# EAGLE board SAMD21_Pro_RF-Panel (EAGLE 9.1.0), part 1 of 7
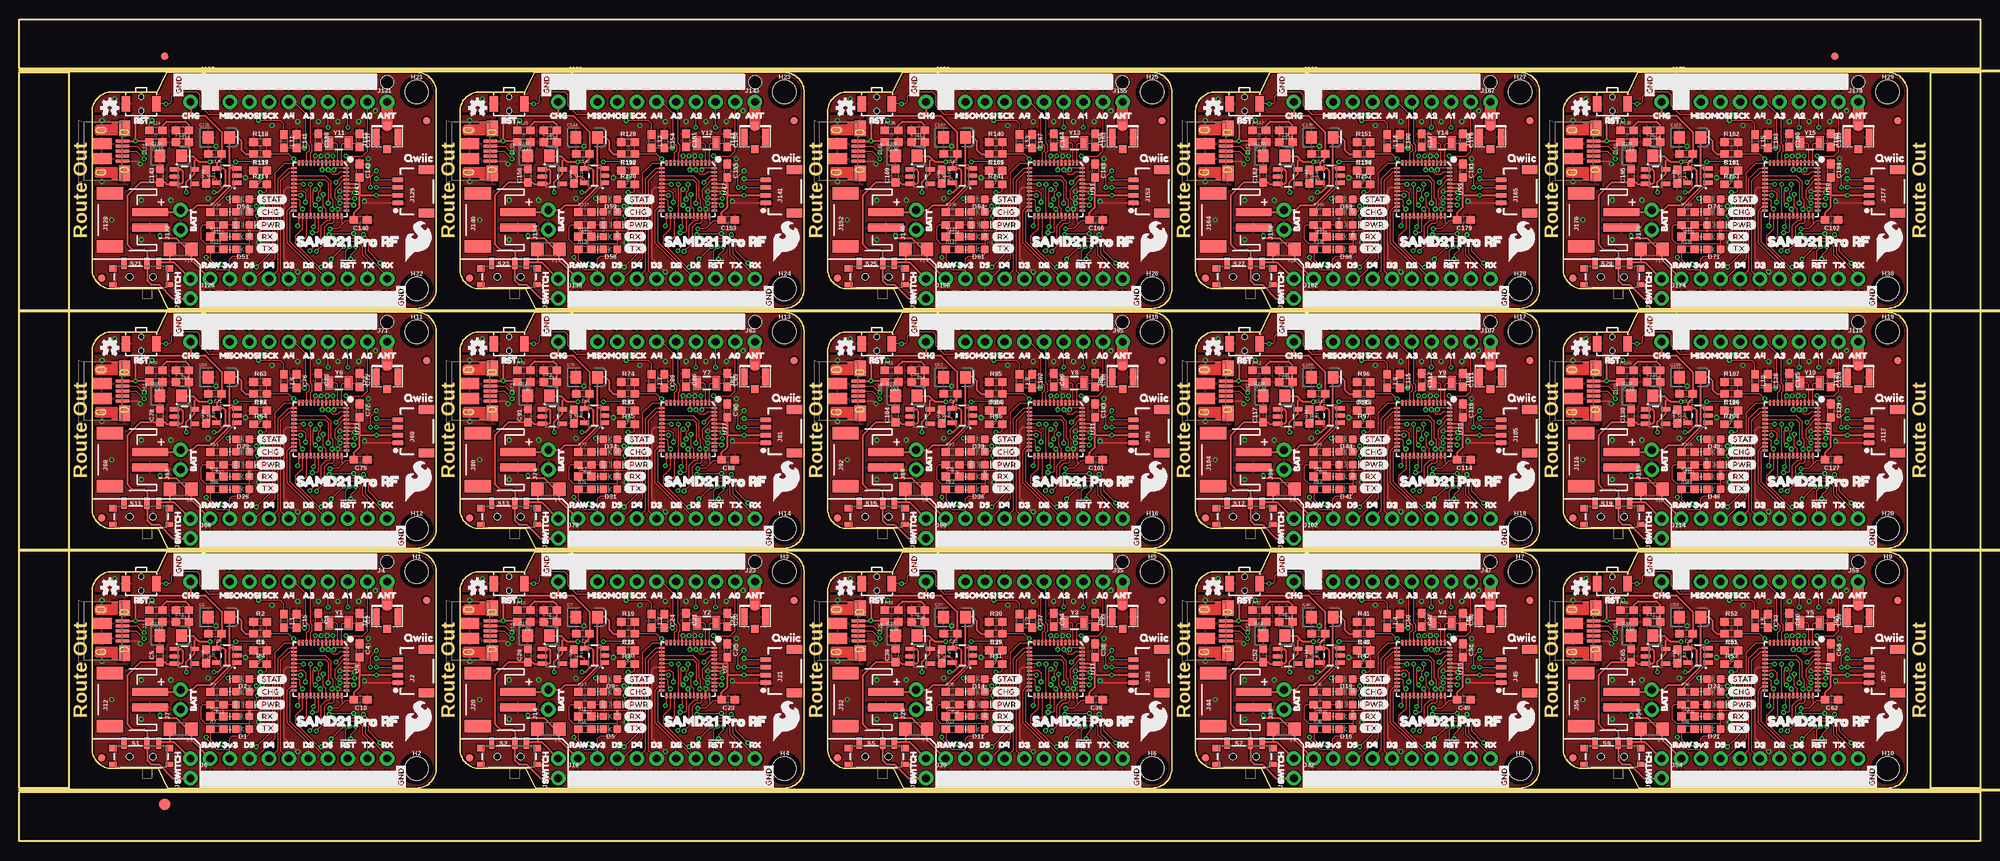
[diagram p0: board, top side]
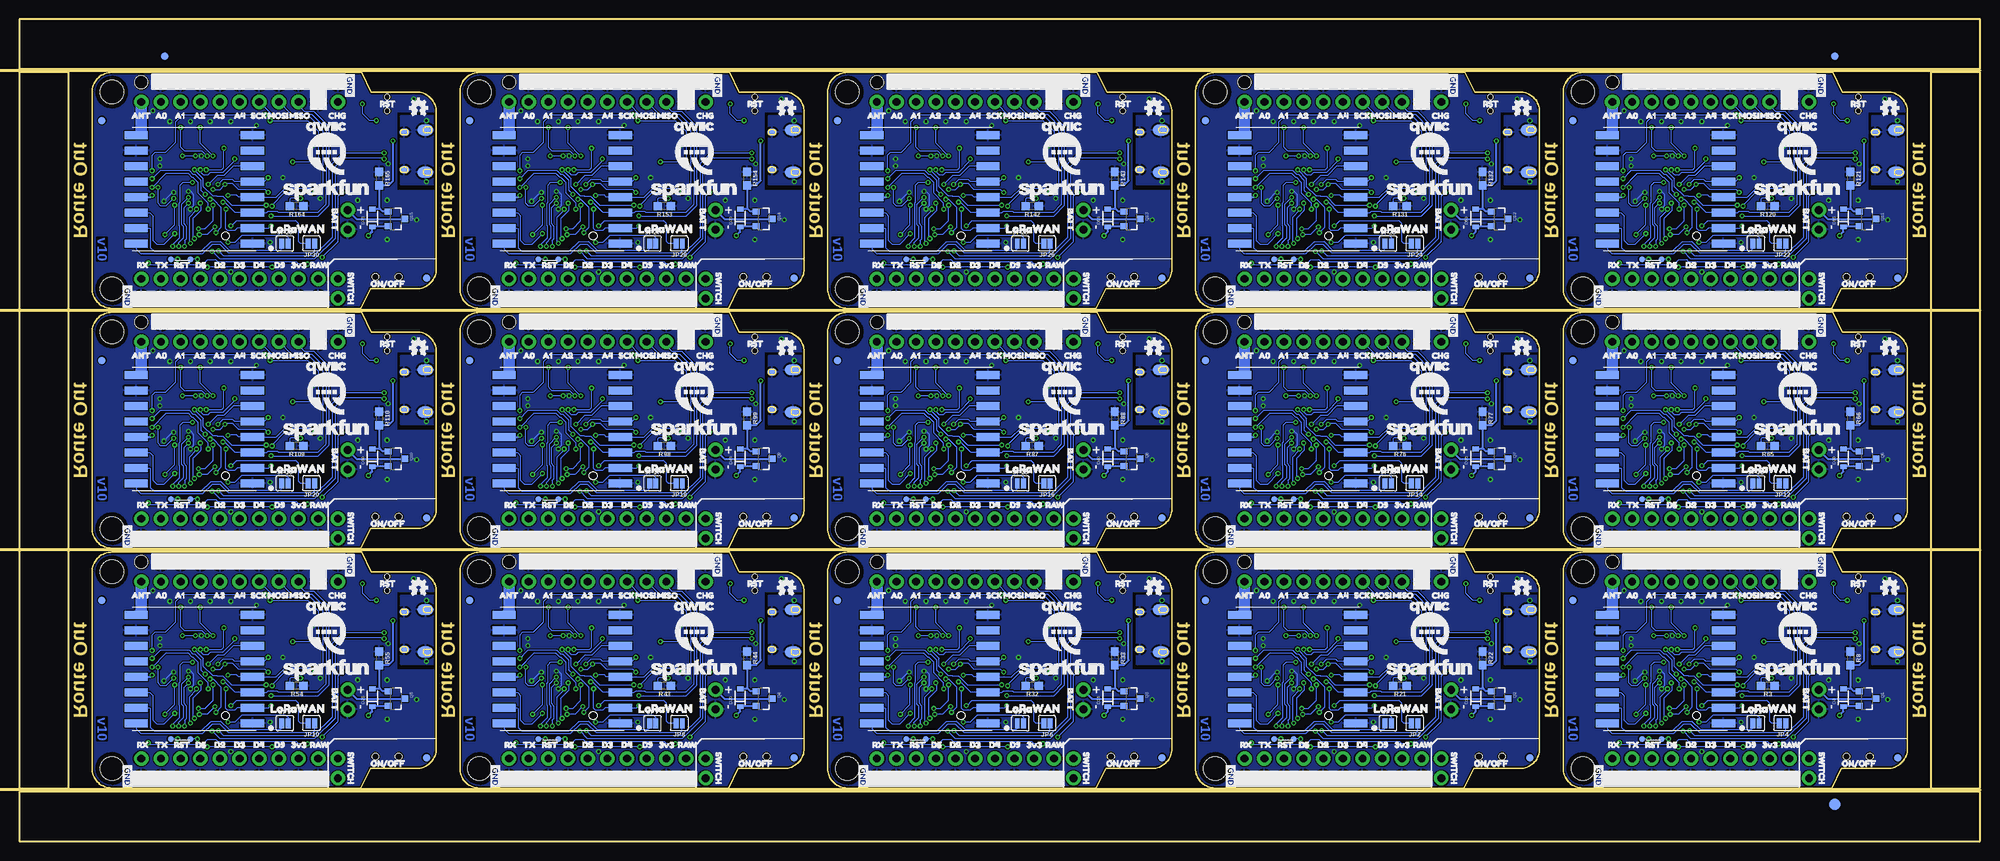
[diagram p1: board, bottom side, seen from below]

Size 253.24 x 106.17 mm. Coordinates in mm from the lower left corner, seen from the top.
Outline: 196 segments
Copper layers (1*16): Top 0.035mm / dielectric 1.5mm / Bottom 0.035mm
Design rules "SparkFun-2-layer-PCBWay-LIMIT": minimum track width 6mil, minimum drill 0.3mm, track to track 6mil, track to pad 6mil, pad to pad 6mil, via to via 6mil, smd to smd 6mil, copper to edge 6mil, drill to drill 6mil, minimum pad ring 6mil, minimum via ring 6mil, stop-mask expansion 4mil, vias tented up to drill 25mil, thermal gap 10mil
Net classes: 0 default: width 0 mm, drill 0 mm; 1 vcc: width 0 mm
Holes 1.7 mm at 47.5,36.07 95,36.07 142.49,36.07 189.99,36.07 237.49,36.07 47.5,67.06 95,67.06 142.49,67.06 189.99,67.06 237.49,67.06 47.5,98.04 95,98.04 142.49,98.04 189.99,98.04 237.49,98.04
Milling: 4 lines

## Footprints (pad centres in the part's own frame; a part is rotated, then mirrored left to right if it is on the bottom)
EIA3216 = smd 1.4 x 1.6: + 1.4,0; - -1.4,0
0603 = smd 1.1 x 1: 1 -0.85,0; 2 0.85,0
LED-0603 = smd 1 x 1: A -0.877,0; C 0.877,0
SOD-323 = smd 0.63 x 0.83: A 1.15,0; C -1.15,0
FIDUCIAL-1X2 = smd 1 x 1: 1 0,0
FIDUCIAL-1.5X3 = smd 1.5 x 1.5: 1 0,0
1206 = smd 1.6 x 1.8: 1 -1.4,0; 2 1.4,0
STAND-OFF-TIGHT = hole 3.048: 0,0
USB-MICROB-PTH-MILL = smd 0.4 x 1.75: D+ 0,0; D- -0.65,0; GND 1.3,0; ID 0.65,0; VBUS -1.3,0 | smd 2 x 1.46: SHIELD -2.9,0.275; SHIELD2 2.9,0.275 | smd 1.425 x 2.5: SHIELD3 -0.963,-2.675; SHIELD4 0.963,-2.675 | smd 1.4 x 2.1 bottom: SHIELD5 -2.731,-2.531; SHIELD7 2.729,-2.531 | smd 1 x 1: SHIELD6 2.7,-2.575 | smd 1.1 x 1.5: SHIELD8 -2.731,-2.731 | smd 1 x 1.3 bottom: SHIELD9 -2.43,0.195; SHIELD10 2.43,0.195
1X04_1MM_RA = smd 0.6 x 1.35: 1 -1.5,0; 2 -0.5,0; 3 0.5,0; 4 1.5,0 | smd 1.2 x 2: NC1 2.8,-3.675; NC2 -2.8,-3.675
1X10_NO_SILK = drill 1.016 pad 1.88: 1 0,0; 2 2.54,0; 3 5.08,0; 4 7.62,0; 5 10.16,0; 6 12.7,0; 7 15.24,0; 8 17.78,0; 9 20.32,0; 10 22.86,0
1X01_NO_SILK = drill 1.016 pad 1.88: 1 0,0
1X09_NO_SILK = drill 1.016 pad 1.88: 1 0,0; 2 2.54,0; 3 5.08,0; 4 7.62,0; 5 10.16,0; 6 12.7,0; 7 15.24,0; 8 17.78,0; 9 20.32,0
1X02_NO_SILK = drill 1.016 pad 1.88: 1 0,0; 2 2.54,0
JST-2-SMD = smd 1 x 4.6: 1 -1,-3.7; 2 1,-3.7 | smd 1.6 x 3.4: NC1 -3.4,1.5; NC2 3.4,1.5
U.FL = smd 2.2 x 0.85: 1 0,1.375; 2 0,-1.375 | smd 1.05 x 1: FEED 1.525,0; NC -1.525,0
SMT-JUMPER_2_NO_SILK = smd 0.635 x 1.27: 1 -0.406,0; 2 0.406,0
SOT23-3 = smd 0.8 x 0.9: 1 -0.95,-1; 2 0.95,-1; 3 0,1.1
SWITCH_SPST_SMD_A = smd 0.7 x 1.5: 1 -2.25,-1.75; 2 -0.75,-1.75; 3 2.25,-1.75 | smd 1 x 0.6: GND1 -3.65,1; GND3 3.65,1 | smd 1 x 0.8: GND2 -3.65,-1.1; GND4 3.65,-1.1 | hole 0.9: -1.5,0; 1.5,0
TACTILE_SWITCH_SMD_RIGHT_ANGLE = smd 1.1 x 2: 1 -1.95,0; 2 1.95,0 | hole 0.7: 0,0.9; 0,-0.9
PAD.03X.03 = smd 0.762 x 0.762: P$1 0,0
SOT23-5 = smd 0.55 x 1.2: 1 -0.95,-1.3; 2 0,-1.3; 3 0.95,-1.3; 4 0.95,1.3; 5 -0.95,1.3
RFM95/96/97/98W = smd 3 x 1: 3.3V 7.5,1; !RESET -7.5,-3; ANT 7.5,-7; DIO0 7.5,3; DIO1 7.5,5; DIO2 7.5,7; DIO3 7.5,-3; DIO4 7.5,-1; DIO5 -7.5,-5; GND@1 -7.5,7; GND@2 -7.5,-7; GND@3 7.5,-5; MISO -7.5,5; MOSI -7.5,3; NSS -7.5,-1; SCK -7.5,1
QFN-48_NO_EXPOSED_PAD = smd 0.7 x 0.25: 1 -3.4,2.75; 2 -3.4,2.25; 3 -3.4,1.75; 4 -3.4,1.25; 5 -3.4,0.75; 6 -3.4,0.25; 7 -3.4,-0.25; 8 -3.4,-0.75; 9 -3.4,-1.25; 10 -3.4,-1.75; 11 -3.4,-2.25; 12 -3.4,-2.75; 25 3.4,-2.75; 26 3.4,-2.25; 27 3.4,-1.75; 28 3.4,-1.25; 29 3.4,-0.75; 30 3.4,-0.25; 31 3.4,0.25; 32 3.4,0.75; 33 3.4,1.25; 34 3.4,1.75; 35 3.4,2.25; 36 3.4,2.75 | smd 0.25 x 0.7: 13 -2.75,-3.4; 14 -2.25,-3.4; 15 -1.75,-3.4; 16 -1.25,-3.4; 17 -0.75,-3.4; 18 -0.25,-3.4; 19 0.25,-3.4; 20 0.75,-3.4; 21 1.25,-3.4; 22 1.75,-3.4; 23 2.25,-3.4; 24 2.75,-3.4; 37 2.75,3.4; 38 2.25,3.4; 39 1.75,3.4; 40 1.25,3.4; 41 0.75,3.4; 42 0.25,3.4; 43 -0.25,3.4; 44 -0.75,3.4; 45 -1.25,3.4; 46 -1.75,3.4; 47 -2.25,3.4; 48 -2.75,3.4
CRYSTAL-SMD-3.2X1.5MM = smd 1 x 1.8: P$1 -1.25,0; P$2 1.25,0

## Placement (x,y rotation side)
C1  10uF  [EIA3216]  25.78,28.96 0 top
C2  15pF  [0603]  43.94,28.57 270 top
C3  15pF  [0603]  38.61,28.57 270 top
C4  0.1uF  [0603]  43.94,24.64 270 top
C5  1.0uF  [0603]  18.16,24 90 top
C6  0.1uF  [0603]  31.11,24.64 0 top
C7  10uF  [EIA3216]  73.28,28.96 0 top
C8  0.1uF  [0603]  65.15,28.32 180 top
C9  4.7uF  [0603]  25.27,26.8 180 top
C10  0.1uF  [0603]  44.07,18.29 180 top
C11  0.1uF  [0603]  17.65,28.32 180 top
C12  1.0uF  [0603]  21.08,29.84 180 top
C13  10uF  [EIA3216]  19.56,26.54 0 top
C14  0.1uF  [0603]  21.08,28.32 0 top
C15  0.1uF  [0603]  35.81,28.45 270 top
C16  1.0uF  [0603]  68.58,29.84 180 top
C17  10uF  [EIA3216]  67.06,26.54 0 top
C18  0.1uF  [0603]  68.58,28.32 0 top
C19  4.7uF  [0603]  72.77,26.8 180 top
C20  15pF  [0603]  91.44,28.57 270 top
C21  15pF  [0603]  86.11,28.57 270 top
C22  0.1uF  [0603]  78.61,24.64 0 top
C23  0.1uF  [0603]  91.57,18.29 180 top
C24  0.1uF  [0603]  83.31,28.45 270 top
C25  0.1uF  [0603]  91.44,24.64 270 top
C26  1.0uF  [0603]  65.66,24 90 top
C27  10uF  [EIA3216]  120.78,28.96 0 top
C28  0.1uF  [0603]  112.65,28.32 180 top
C29  1.0uF  [0603]  116.08,29.84 180 top
C30  10uF  [EIA3216]  114.55,26.54 0 top
C31  0.1uF  [0603]  116.08,28.32 0 top
C32  4.7uF  [0603]  120.27,26.8 180 top
C33  15pF  [0603]  138.94,28.57 270 top
C34  15pF  [0603]  133.6,28.57 270 top
C35  0.1uF  [0603]  126.11,24.64 0 top
C36  0.1uF  [0603]  139.06,18.29 180 top
C37  0.1uF  [0603]  130.81,28.45 270 top
C38  0.1uF  [0603]  138.94,24.64 270 top
C39  1.0uF  [0603]  113.16,24 90 top
C40  10uF  [EIA3216]  168.28,28.96 0 top
C41  0.1uF  [0603]  160.15,28.32 180 top
C42  1.0uF  [0603]  163.58,29.84 180 top
C43  10uF  [EIA3216]  162.05,26.54 0 top
C44  0.1uF  [0603]  163.58,28.32 0 top
C45  4.7uF  [0603]  167.77,26.8 180 top
C46  15pF  [0603]  186.44,28.57 270 top
C47  15pF  [0603]  181.1,28.57 270 top
C48  0.1uF  [0603]  173.61,24.64 0 top
C49  0.1uF  [0603]  186.56,18.29 180 top
C50  0.1uF  [0603]  178.31,28.45 270 top
C51  0.1uF  [0603]  186.44,24.64 270 top
C52  1.0uF  [0603]  160.66,24 90 top
C53  10uF  [EIA3216]  215.77,28.96 0 top
C54  0.1uF  [0603]  207.65,28.32 180 top
C55  1.0uF  [0603]  211.07,29.84 180 top
C56  10uF  [EIA3216]  209.55,26.54 0 top
C57  0.1uF  [0603]  211.07,28.32 0 top
C58  4.7uF  [0603]  215.26,26.8 180 top
C59  15pF  [0603]  233.93,28.57 270 top
C60  15pF  [0603]  228.6,28.57 270 top
C61  0.1uF  [0603]  221.11,24.64 0 top
C62  0.1uF  [0603]  234.06,18.29 180 top
C63  0.1uF  [0603]  225.81,28.45 270 top
C64  0.1uF  [0603]  233.93,24.64 270 top
C65  1.0uF  [0603]  208.15,24 90 top
C66  10uF  [EIA3216]  25.78,59.94 0 top
C67  0.1uF  [0603]  17.65,59.31 180 top
C68  1.0uF  [0603]  21.08,60.83 180 top
C69  10uF  [EIA3216]  19.56,57.53 0 top
C70  0.1uF  [0603]  21.08,59.31 0 top
C71  4.7uF  [0603]  25.27,57.78 180 top
C72  15pF  [0603]  43.94,59.56 270 top
C73  15pF  [0603]  38.61,59.56 270 top
C74  0.1uF  [0603]  31.11,55.63 0 top
C75  0.1uF  [0603]  44.07,49.28 180 top
C76  0.1uF  [0603]  35.81,59.44 270 top
C77  0.1uF  [0603]  43.94,55.63 270 top
C78  1.0uF  [0603]  18.16,54.99 90 top
C79  10uF  [EIA3216]  73.28,59.94 0 top
C80  0.1uF  [0603]  65.15,59.31 180 top
C81  1.0uF  [0603]  68.58,60.83 180 top
C82  10uF  [EIA3216]  67.06,57.53 0 top
C83  0.1uF  [0603]  68.58,59.31 0 top
C84  4.7uF  [0603]  72.77,57.78 180 top
C85  15pF  [0603]  91.44,59.56 270 top
C86  15pF  [0603]  86.11,59.56 270 top
C87  0.1uF  [0603]  78.61,55.63 0 top
C88  0.1uF  [0603]  91.57,49.28 180 top
C89  0.1uF  [0603]  83.31,59.44 270 top
C90  0.1uF  [0603]  91.44,55.63 270 top
C91  1.0uF  [0603]  65.66,54.99 90 top
C92  10uF  [EIA3216]  120.78,59.94 0 top
C93  0.1uF  [0603]  112.65,59.31 180 top
C94  1.0uF  [0603]  116.08,60.83 180 top
C95  10uF  [EIA3216]  114.55,57.53 0 top
C96  0.1uF  [0603]  116.08,59.31 0 top
C97  4.7uF  [0603]  120.27,57.78 180 top
C98  15pF  [0603]  138.94,59.56 270 top
C99  15pF  [0603]  133.6,59.56 270 top
C100  0.1uF  [0603]  126.11,55.63 0 top
C101  0.1uF  [0603]  139.06,49.28 180 top
C102  0.1uF  [0603]  130.81,59.44 270 top
C103  0.1uF  [0603]  138.94,55.63 270 top
C104  1.0uF  [0603]  113.16,54.99 90 top
C105  10uF  [EIA3216]  168.28,59.94 0 top
C106  0.1uF  [0603]  160.15,59.31 180 top
C107  1.0uF  [0603]  163.58,60.83 180 top
C108  10uF  [EIA3216]  162.05,57.53 0 top
C109  0.1uF  [0603]  163.58,59.31 0 top
C110  4.7uF  [0603]  167.77,57.78 180 top
C111  15pF  [0603]  186.44,59.56 270 top
C112  15pF  [0603]  181.1,59.56 270 top
C113  0.1uF  [0603]  173.61,55.63 0 top
C114  0.1uF  [0603]  186.56,49.28 180 top
C115  0.1uF  [0603]  178.31,59.44 270 top
C116  0.1uF  [0603]  186.44,55.63 270 top
C117  1.0uF  [0603]  160.66,54.99 90 top
C118  10uF  [EIA3216]  215.77,59.94 0 top
C119  0.1uF  [0603]  207.65,59.31 180 top
C120  1.0uF  [0603]  211.07,60.83 180 top
C121  10uF  [EIA3216]  209.55,57.53 0 top
C122  0.1uF  [0603]  211.07,59.31 0 top
C123  4.7uF  [0603]  215.26,57.78 180 top
C124  15pF  [0603]  233.93,59.56 270 top
C125  15pF  [0603]  228.6,59.56 270 top
C126  0.1uF  [0603]  221.11,55.63 0 top
C127  0.1uF  [0603]  234.06,49.28 180 top
C128  0.1uF  [0603]  225.81,59.44 270 top
C129  0.1uF  [0603]  233.93,55.63 270 top
C130  1.0uF  [0603]  208.15,54.99 90 top
C131  10uF  [EIA3216]  25.78,90.93 0 top
C132  0.1uF  [0603]  17.65,90.3 180 top
C133  1.0uF  [0603]  21.08,91.82 180 top
C134  10uF  [EIA3216]  19.56,88.52 0 top
C135  0.1uF  [0603]  21.08,90.3 0 top
C136  4.7uF  [0603]  25.27,88.77 180 top
C137  15pF  [0603]  43.94,90.55 270 top
C138  15pF  [0603]  38.61,90.55 270 top
C139  0.1uF  [0603]  31.11,86.61 0 top
C140  0.1uF  [0603]  44.07,80.26 180 top
C141  0.1uF  [0603]  35.81,90.42 270 top
C142  0.1uF  [0603]  43.94,86.61 270 top
C143  1.0uF  [0603]  18.16,85.98 90 top
C144  10uF  [EIA3216]  73.28,90.93 0 top
C145  0.1uF  [0603]  65.15,90.3 180 top
C146  1.0uF  [0603]  68.58,91.82 180 top
C147  10uF  [EIA3216]  67.06,88.52 0 top
C148  0.1uF  [0603]  68.58,90.3 0 top
C149  4.7uF  [0603]  72.77,88.77 180 top
C150  15pF  [0603]  91.44,90.55 270 top
C151  15pF  [0603]  86.11,90.55 270 top
C152  0.1uF  [0603]  78.61,86.61 0 top
C153  0.1uF  [0603]  91.57,80.26 180 top
C154  0.1uF  [0603]  83.31,90.42 270 top
C155  0.1uF  [0603]  91.44,86.61 270 top
C156  1.0uF  [0603]  65.66,85.98 90 top
C157  10uF  [EIA3216]  120.78,90.93 0 top
C158  0.1uF  [0603]  112.65,90.3 180 top
C159  1.0uF  [0603]  116.08,91.82 180 top
C160  10uF  [EIA3216]  114.55,88.52 0 top
C161  0.1uF  [0603]  116.08,90.3 0 top
C162  4.7uF  [0603]  120.27,88.77 180 top
C163  15pF  [0603]  138.94,90.55 270 top
C164  15pF  [0603]  133.6,90.55 270 top
C165  0.1uF  [0603]  126.11,86.61 0 top
C166  0.1uF  [0603]  139.06,80.26 180 top
C167  0.1uF  [0603]  130.81,90.42 270 top
C168  0.1uF  [0603]  138.94,86.61 270 top
C169  1.0uF  [0603]  113.16,85.98 90 top
C170  10uF  [EIA3216]  168.28,90.93 0 top
C171  0.1uF  [0603]  160.15,90.3 180 top
C172  1.0uF  [0603]  163.58,91.82 180 top
C173  10uF  [EIA3216]  162.05,88.52 0 top
C174  0.1uF  [0603]  163.58,90.3 0 top
C175  4.7uF  [0603]  167.77,88.77 180 top
C176  15pF  [0603]  186.44,90.55 270 top
C177  15pF  [0603]  181.1,90.55 270 top
C178  0.1uF  [0603]  173.61,86.61 0 top
C179  0.1uF  [0603]  186.56,80.26 180 top
C180  0.1uF  [0603]  178.31,90.42 270 top
C181  0.1uF  [0603]  186.44,86.61 270 top
C182  1.0uF  [0603]  160.66,85.98 90 top
C183  10uF  [EIA3216]  215.77,90.93 0 top
C184  0.1uF  [0603]  207.65,90.3 180 top
C185  1.0uF  [0603]  211.07,91.82 180 top
C186  10uF  [EIA3216]  209.55,88.52 0 top
C187  0.1uF  [0603]  211.07,90.3 0 top
C188  4.7uF  [0603]  215.26,88.77 180 top
C189  15pF  [0603]  233.93,90.55 270 top
C190  15pF  [0603]  228.6,90.55 270 top
C191  0.1uF  [0603]  221.11,86.61 0 top
C192  0.1uF  [0603]  234.06,80.26 180 top
C193  0.1uF  [0603]  225.81,90.42 270 top
C194  0.1uF  [0603]  233.93,86.61 270 top
C195  1.0uF  [0603]  208.15,85.98 90 top
D1  Green  [LED-0603]  28.83,14.48 180 top
D2  BLUE  [LED-0603]  28.83,20.95 180 top
D3  BAT20J  [SOD-323]  17.65,18.54 90 bottom
D4  BLUE  [LED-0603]  28.83,19.3 180 top
D5  Green  [LED-0603]  76.33,14.48 180 top
D6  Yellow  [LED-0603]  28.83,16.13 180 top
D7  BLUE  [LED-0603]  76.33,19.3 180 top
D8  Yellow  [LED-0603]  76.33,16.13 180 top
D9  BLUE  [LED-0603]  76.33,20.95 180 top
D10  BAT20J  [SOD-323]  65.15,18.54 90 bottom
D11  Green  [LED-0603]  123.83,14.48 180 top
D12  BLUE  [LED-0603]  123.83,19.3 180 top
D13  Yellow  [LED-0603]  123.83,16.13 180 top
D14  BLUE  [LED-0603]  123.83,20.95 180 top
D15  BAT20J  [SOD-323]  112.65,18.54 90 bottom
D16  Green  [LED-0603]  171.32,14.48 180 top
D17  BLUE  [LED-0603]  171.32,19.3 180 top
D18  Yellow  [LED-0603]  171.32,16.13 180 top
D19  BLUE  [LED-0603]  171.32,20.95 180 top
D20  BAT20J  [SOD-323]  160.15,18.54 90 bottom
D21  Green  [LED-0603]  218.82,14.48 180 top
D22  BLUE  [LED-0603]  218.82,19.3 180 top
D23  Yellow  [LED-0603]  218.82,16.13 180 top
D24  BLUE  [LED-0603]  218.82,20.95 180 top
D25  BAT20J  [SOD-323]  207.65,18.54 90 bottom
D26  Green  [LED-0603]  28.83,45.47 180 top
D27  BLUE  [LED-0603]  28.83,50.29 180 top
D28  Yellow  [LED-0603]  28.83,47.12 180 top
D29  BLUE  [LED-0603]  28.83,51.94 180 top
D30  BAT20J  [SOD-323]  17.65,49.53 90 bottom
D31  Green  [LED-0603]  76.33,45.47 180 top
D32  BLUE  [LED-0603]  76.33,50.29 180 top
D33  Yellow  [LED-0603]  76.33,47.12 180 top
D34  BLUE  [LED-0603]  76.33,51.94 180 top
D35  BAT20J  [SOD-323]  65.15,49.53 90 bottom
D36  Green  [LED-0603]  123.83,45.47 180 top
D37  BLUE  [LED-0603]  123.83,50.29 180 top
D38  Yellow  [LED-0603]  123.83,47.12 180 top
D39  BLUE  [LED-0603]  123.83,51.94 180 top
D40  BAT20J  [SOD-323]  112.65,49.53 90 bottom
D41  Green  [LED-0603]  171.32,45.47 180 top
D42  BLUE  [LED-0603]  171.32,50.29 180 top
D43  Yellow  [LED-0603]  171.32,47.12 180 top
D44  BLUE  [LED-0603]  171.32,51.94 180 top
D45  BAT20J  [SOD-323]  160.15,49.53 90 bottom
D46  Green  [LED-0603]  218.82,45.47 180 top
D47  BLUE  [LED-0603]  218.82,50.29 180 top
D48  Yellow  [LED-0603]  218.82,47.12 180 top
D49  BLUE  [LED-0603]  218.82,51.94 180 top
D50  BAT20J  [SOD-323]  207.65,49.53 90 bottom
D51  Green  [LED-0603]  28.83,76.45 180 top
D52  BLUE  [LED-0603]  28.83,81.28 180 top
D53  Yellow  [LED-0603]  28.83,78.11 180 top
D54  BLUE  [LED-0603]  28.83,82.93 180 top
D55  BAT20J  [SOD-323]  17.65,80.52 90 bottom
D56  Green  [LED-0603]  76.33,76.45 180 top
D57  BLUE  [LED-0603]  76.33,81.28 180 top
D58  Yellow  [LED-0603]  76.33,78.11 180 top
D59  BLUE  [LED-0603]  76.33,82.93 180 top
D60  BAT20J  [SOD-323]  65.15,80.52 90 bottom
D61  Green  [LED-0603]  123.83,76.45 180 top
D62  BLUE  [LED-0603]  123.83,81.28 180 top
D63  Yellow  [LED-0603]  123.83,78.11 180 top
D64  BLUE  [LED-0603]  123.83,82.93 180 top
D65  BAT20J  [SOD-323]  112.65,80.52 90 bottom
D66  Green  [LED-0603]  171.32,76.45 180 top
D67  BLUE  [LED-0603]  171.32,81.28 180 top
D68  Yellow  [LED-0603]  171.32,78.11 180 top
D69  BLUE  [LED-0603]  171.32,82.93 180 top
D70  BAT20J  [SOD-323]  160.15,80.52 90 bottom
D71  Green  [LED-0603]  218.82,76.45 180 top
D72  BLUE  [LED-0603]  218.82,81.28 180 top
D73  Yellow  [LED-0603]  218.82,78.11 180 top
D74  BLUE  [LED-0603]  218.82,82.93 180 top
D75  BAT20J  [SOD-323]  207.65,80.52 90 bottom
E$1  [FIDUCIAL-1X2]  18.8,101.41 0 top
E$2  [FIDUCIAL-1X2]  18.8,101.41 0 bottom
E$3  [FIDUCIAL-1X2]  234.44,101.41 0 top
E$4  [FIDUCIAL-1X2]  234.44,101.41 0 bottom
E$5  [FIDUCIAL-1.5X3]  18.8,4.76 0 top
E$6  [FIDUCIAL-1.5X3]  18.8,4.76 0 bottom
F1  6V/0.5A  [1206]  20.83,14.48 180 top
F2  6V/0.5A  [1206]  68.33,14.48 180 top
F3  6V/0.5A  [1206]  115.82,14.48 180 top
F4  6V/0.5A  [1206]  163.32,14.48 180 top
F5  6V/0.5A  [1206]  210.82,14.48 180 top
F6  6V/0.5A  [1206]  20.83,45.47 180 top
F7  6V/0.5A  [1206]  68.33,45.47 180 top
F8  6V/0.5A  [1206]  115.82,45.47 180 top
F9  6V/0.5A  [1206]  163.32,45.47 180 top
F10  6V/0.5A  [1206]  210.82,45.47 180 top
F11  6V/0.5A  [1206]  20.83,76.45 180 top
F12  6V/0.5A  [1206]  68.33,76.45 180 top
F13  6V/0.5A  [1206]  115.82,76.45 180 top
F14  6V/0.5A  [1206]  163.32,76.45 180 top
F15  6V/0.5A  [1206]  210.82,76.45 180 top
FD1  FIDUCIAL1X2  [FIDUCIAL-1X2]  10.67,10.79 0 bottom
FD2  FIDUCIAL1X2  [FIDUCIAL-1X2]  52.58,31.12 0 bottom
FD3  FIDUCIAL1X2  [FIDUCIAL-1X2]  10.67,10.79 0 top
FD4  FIDUCIAL1X2  [FIDUCIAL-1X2]  52.58,31.12 0 top
FD5  FIDUCIAL1X2  [FIDUCIAL-1X2]  58.17,10.79 0 bottom
FD6  FIDUCIAL1X2  [FIDUCIAL-1X2]  100.08,31.12 0 bottom
FD7  FIDUCIAL1X2  [FIDUCIAL-1X2]  58.17,10.79 0 top
FD8  FIDUCIAL1X2  [FIDUCIAL-1X2]  100.08,31.12 0 top
FD9  FIDUCIAL1X2  [FIDUCIAL-1X2]  105.66,10.79 0 bottom
FD10  FIDUCIAL1X2  [FIDUCIAL-1X2]  147.57,31.12 0 bottom
FD11  FIDUCIAL1X2  [FIDUCIAL-1X2]  105.66,10.79 0 top
FD12  FIDUCIAL1X2  [FIDUCIAL-1X2]  147.57,31.12 0 top
FD13  FIDUCIAL1X2  [FIDUCIAL-1X2]  153.16,10.79 0 bottom
FD14  FIDUCIAL1X2  [FIDUCIAL-1X2]  195.07,31.12 0 bottom
FD15  FIDUCIAL1X2  [FIDUCIAL-1X2]  153.16,10.79 0 top
FD16  FIDUCIAL1X2  [FIDUCIAL-1X2]  195.07,31.12 0 top
FD17  FIDUCIAL1X2  [FIDUCIAL-1X2]  200.66,10.79 0 bottom
FD18  FIDUCIAL1X2  [FIDUCIAL-1X2]  242.57,31.12 0 bottom
FD19  FIDUCIAL1X2  [FIDUCIAL-1X2]  200.66,10.79 0 top
FD20  FIDUCIAL1X2  [FIDUCIAL-1X2]  242.57,31.12 0 top
FD21  FIDUCIAL1X2  [FIDUCIAL-1X2]  10.67,41.78 0 bottom
FD22  FIDUCIAL1X2  [FIDUCIAL-1X2]  52.58,62.1 0 bottom
FD23  FIDUCIAL1X2  [FIDUCIAL-1X2]  10.67,41.78 0 top
FD24  FIDUCIAL1X2  [FIDUCIAL-1X2]  52.58,62.1 0 top
FD25  FIDUCIAL1X2  [FIDUCIAL-1X2]  58.17,41.78 0 bottom
FD26  FIDUCIAL1X2  [FIDUCIAL-1X2]  100.08,62.1 0 bottom
FD27  FIDUCIAL1X2  [FIDUCIAL-1X2]  58.17,41.78 0 top
FD28  FIDUCIAL1X2  [FIDUCIAL-1X2]  100.08,62.1 0 top
FD29  FIDUCIAL1X2  [FIDUCIAL-1X2]  105.66,41.78 0 bottom
FD30  FIDUCIAL1X2  [FIDUCIAL-1X2]  147.57,62.1 0 bottom
FD31  FIDUCIAL1X2  [FIDUCIAL-1X2]  105.66,41.78 0 top
FD32  FIDUCIAL1X2  [FIDUCIAL-1X2]  147.57,62.1 0 top
FD33  FIDUCIAL1X2  [FIDUCIAL-1X2]  153.16,41.78 0 bottom
FD34  FIDUCIAL1X2  [FIDUCIAL-1X2]  195.07,62.1 0 bottom
FD35  FIDUCIAL1X2  [FIDUCIAL-1X2]  153.16,41.78 0 top
FD36  FIDUCIAL1X2  [FIDUCIAL-1X2]  195.07,62.1 0 top
FD37  FIDUCIAL1X2  [FIDUCIAL-1X2]  200.66,41.78 0 bottom
FD38  FIDUCIAL1X2  [FIDUCIAL-1X2]  242.57,62.1 0 bottom
FD39  FIDUCIAL1X2  [FIDUCIAL-1X2]  200.66,41.78 0 top
FD40  FIDUCIAL1X2  [FIDUCIAL-1X2]  242.57,62.1 0 top
FD41  FIDUCIAL1X2  [FIDUCIAL-1X2]  10.67,72.77 0 bottom
FD42  FIDUCIAL1X2  [FIDUCIAL-1X2]  52.58,93.09 0 bottom
FD43  FIDUCIAL1X2  [FIDUCIAL-1X2]  10.67,72.77 0 top
FD44  FIDUCIAL1X2  [FIDUCIAL-1X2]  52.58,93.09 0 top
FD45  FIDUCIAL1X2  [FIDUCIAL-1X2]  58.17,72.77 0 bottom
FD46  FIDUCIAL1X2  [FIDUCIAL-1X2]  100.08,93.09 0 bottom
FD47  FIDUCIAL1X2  [FIDUCIAL-1X2]  58.17,72.77 0 top
FD48  FIDUCIAL1X2  [FIDUCIAL-1X2]  100.08,93.09 0 top
FD49  FIDUCIAL1X2  [FIDUCIAL-1X2]  105.66,72.77 0 bottom
FD50  FIDUCIAL1X2  [FIDUCIAL-1X2]  147.57,93.09 0 bottom
FD51  FIDUCIAL1X2  [FIDUCIAL-1X2]  105.66,72.77 0 top
FD52  FIDUCIAL1X2  [FIDUCIAL-1X2]  147.57,93.09 0 top
FD53  FIDUCIAL1X2  [FIDUCIAL-1X2]  153.16,72.77 0 bottom
FD54  FIDUCIAL1X2  [FIDUCIAL-1X2]  195.07,93.09 0 bottom
FD55  FIDUCIAL1X2  [FIDUCIAL-1X2]  153.16,72.77 0 top
FD56  FIDUCIAL1X2  [FIDUCIAL-1X2]  195.07,93.09 0 top
FD57  FIDUCIAL1X2  [FIDUCIAL-1X2]  200.66,72.77 0 bottom
FD58  FIDUCIAL1X2  [FIDUCIAL-1X2]  242.57,93.09 0 bottom
FD59  FIDUCIAL1X2  [FIDUCIAL-1X2]  200.66,72.77 0 top
FD60  FIDUCIAL1X2  [FIDUCIAL-1X2]  242.57,93.09 0 top
H1  STAND-OFFTIGHT  [STAND-OFF-TIGHT]  51.31,34.8 0 top
H2  STAND-OFFTIGHT  [STAND-OFF-TIGHT]  51.31,9.4 0 top
H3  STAND-OFFTIGHT  [STAND-OFF-TIGHT]  98.81,34.8 0 top
H4  STAND-OFFTIGHT  [STAND-OFF-TIGHT]  98.81,9.4 0 top
H5  STAND-OFFTIGHT  [STAND-OFF-TIGHT]  146.3,34.8 0 top
H6  STAND-OFFTIGHT  [STAND-OFF-TIGHT]  146.3,9.4 0 top
H7  STAND-OFFTIGHT  [STAND-OFF-TIGHT]  193.8,34.8 0 top
H8  STAND-OFFTIGHT  [STAND-OFF-TIGHT]  193.8,9.4 0 top
H9  STAND-OFFTIGHT  [STAND-OFF-TIGHT]  241.3,34.8 0 top
H10  STAND-OFFTIGHT  [STAND-OFF-TIGHT]  241.3,9.4 0 top
H11  STAND-OFFTIGHT  [STAND-OFF-TIGHT]  51.31,65.79 0 top
H12  STAND-OFFTIGHT  [STAND-OFF-TIGHT]  51.31,40.39 0 top
H13  STAND-OFFTIGHT  [STAND-OFF-TIGHT]  98.81,65.79 0 top
H14  STAND-OFFTIGHT  [STAND-OFF-TIGHT]  98.81,40.39 0 top
H15  STAND-OFFTIGHT  [STAND-OFF-TIGHT]  146.3,65.79 0 top
H16  STAND-OFFTIGHT  [STAND-OFF-TIGHT]  146.3,40.39 0 top
H17  STAND-OFFTIGHT  [STAND-OFF-TIGHT]  193.8,65.79 0 top
H18  STAND-OFFTIGHT  [STAND-OFF-TIGHT]  193.8,40.39 0 top
H19  STAND-OFFTIGHT  [STAND-OFF-TIGHT]  241.3,65.79 0 top
H20  STAND-OFFTIGHT  [STAND-OFF-TIGHT]  241.3,40.39 0 top
H21  STAND-OFFTIGHT  [STAND-OFF-TIGHT]  51.31,96.77 0 top
H22  STAND-OFFTIGHT  [STAND-OFF-TIGHT]  51.31,71.37 0 top
H23  STAND-OFFTIGHT  [STAND-OFF-TIGHT]  98.81,96.77 0 top
H24  STAND-OFFTIGHT  [STAND-OFF-TIGHT]  98.81,71.37 0 top
H25  STAND-OFFTIGHT  [STAND-OFF-TIGHT]  146.3,96.77 0 top
H26  STAND-OFFTIGHT  [STAND-OFF-TIGHT]  146.3,71.37 0 top
H27  STAND-OFFTIGHT  [STAND-OFF-TIGHT]  193.8,96.77 0 top
H28  STAND-OFFTIGHT  [STAND-OFF-TIGHT]  193.8,71.37 0 top
H29  STAND-OFFTIGHT  [STAND-OFF-TIGHT]  241.3,96.77 0 top
H30  STAND-OFFTIGHT  [STAND-OFF-TIGHT]  241.3,71.37 0 top
J1  [USB-MICROB-PTH-MILL]  13.33,27.18 270 top
J2  [1X04_1MM_RA]  48.89,21.97 90 top
J3  [1X10_NO_SILK]  24.64,10.67 0 top
J4  [1X01_NO_SILK]  47.5,33.53 0 top
J5  [1X09_NO_SILK]  24.64,36.07 0 top
J6  [1X10_NO_SILK]  24.64,8.13 0 top
J7  PTH  [1X02_NO_SILK]  20.83,17.02 90 top
J8  [1X02_NO_SILK]  22.1,36.07 270 top
J9  External On/Off  [1X02_NO_SILK]  22.1,8.13 90 top
J10  [USB-MICROB-PTH-MILL]  60.83,27.18 270 top
J11  [1X09_NO_SILK]  24.64,33.53 0 top
J12  JST  [JST-2-SMD]  13.21,18.29 90 top
J13  U.FL  [U.FL]  47.5,28.96 90 top
J14  PTH  [1X02_NO_SILK]  68.33,17.02 90 top
J15  [1X02_NO_SILK]  69.6,36.07 270 top
J16  External On/Off  [1X02_NO_SILK]  69.6,8.13 90 top
J17  [1X10_NO_SILK]  72.14,10.67 0 top
J18  [1X10_NO_SILK]  72.14,8.13 0 top
J19  [1X09_NO_SILK]  72.14,36.07 0 top
J20  JST  [JST-2-SMD]  60.71,18.29 90 top
J21  [1X04_1MM_RA]  96.39,21.97 90 top
J22  [1X09_NO_SILK]  72.14,33.53 0 top
J23  [1X01_NO_SILK]  95,33.53 0 top
J24  U.FL  [U.FL]  95,28.96 90 top
J25  [USB-MICROB-PTH-MILL]  108.33,27.18 270 top
J26  PTH  [1X02_NO_SILK]  115.82,17.02 90 top
J27  [1X02_NO_SILK]  117.09,36.07 270 top
J28  External On/Off  [1X02_NO_SILK]  117.09,8.13 90 top
J29  [1X10_NO_SILK]  119.63,10.67 0 top
J30  [1X10_NO_SILK]  119.63,8.13 0 top
J31  [1X09_NO_SILK]  119.63,36.07 0 top
J32  JST  [JST-2-SMD]  108.2,18.29 90 top
J33  [1X04_1MM_RA]  143.89,21.97 90 top
J34  [1X09_NO_SILK]  119.63,33.53 0 top
J35  [1X01_NO_SILK]  142.49,33.53 0 top
J36  U.FL  [U.FL]  142.49,28.96 90 top
J37  [USB-MICROB-PTH-MILL]  155.83,27.18 270 top
J38  PTH  [1X02_NO_SILK]  163.32,17.02 90 top
J39  [1X02_NO_SILK]  164.59,36.07 270 top
J40  External On/Off  [1X02_NO_SILK]  164.59,8.13 90 top
J41  [1X10_NO_SILK]  167.13,10.67 0 top
J42  [1X10_NO_SILK]  167.13,8.13 0 top
J43  [1X09_NO_SILK]  167.13,36.07 0 top
J44  JST  [JST-2-SMD]  155.7,18.29 90 top
J45  [1X04_1MM_RA]  191.39,21.97 90 top
J46  [1X09_NO_SILK]  167.13,33.53 0 top
J47  [1X01_NO_SILK]  189.99,33.53 0 top
J48  U.FL  [U.FL]  189.99,28.96 90 top
J49  [USB-MICROB-PTH-MILL]  203.33,27.18 270 top
J50  PTH  [1X02_NO_SILK]  210.82,17.02 90 top
J51  [1X02_NO_SILK]  212.09,36.07 270 top
J52  External On/Off  [1X02_NO_SILK]  212.09,8.13 90 top
J53  [1X10_NO_SILK]  214.63,10.67 0 top
J54  [1X10_NO_SILK]  214.63,8.13 0 top
J55  [1X09_NO_SILK]  214.63,36.07 0 top
J56  JST  [JST-2-SMD]  203.2,18.29 90 top
J57  [1X04_1MM_RA]  238.89,21.97 90 top
J58  [1X09_NO_SILK]  214.63,33.53 0 top
J59  [1X01_NO_SILK]  237.49,33.53 0 top
J60  U.FL  [U.FL]  237.49,28.96 90 top
J61  [USB-MICROB-PTH-MILL]  13.33,58.17 270 top
J62  PTH  [1X02_NO_SILK]  20.83,48.01 90 top
J63  [1X02_NO_SILK]  22.1,67.06 270 top
J64  External On/Off  [1X02_NO_SILK]  22.1,39.12 90 top
J65  [1X10_NO_SILK]  24.64,41.66 0 top
J66  [1X10_NO_SILK]  24.64,39.12 0 top
J67  [1X09_NO_SILK]  24.64,67.06 0 top
J68  JST  [JST-2-SMD]  13.21,49.28 90 top
J69  [1X04_1MM_RA]  48.89,52.96 90 top
J70  [1X09_NO_SILK]  24.64,64.52 0 top
J71  [1X01_NO_SILK]  47.5,64.52 0 top
J72  U.FL  [U.FL]  47.5,59.94 90 top
J73  [USB-MICROB-PTH-MILL]  60.83,58.17 270 top
J74  PTH  [1X02_NO_SILK]  68.33,48.01 90 top
J75  [1X02_NO_SILK]  69.6,67.06 270 top
J76  External On/Off  [1X02_NO_SILK]  69.6,39.12 90 top
J77  [1X10_NO_SILK]  72.14,41.66 0 top
J78  [1X10_NO_SILK]  72.14,39.12 0 top
J79  [1X09_NO_SILK]  72.14,67.06 0 top
J80  JST  [JST-2-SMD]  60.71,49.28 90 top
J81  [1X04_1MM_RA]  96.39,52.96 90 top
J82  [1X09_NO_SILK]  72.14,64.52 0 top
J83  [1X01_NO_SILK]  95,64.52 0 top
J84  U.FL  [U.FL]  95,59.94 90 top
J85  [USB-MICROB-PTH-MILL]  108.33,58.17 270 top
J86  PTH  [1X02_NO_SILK]  115.82,48.01 90 top
J87  [1X02_NO_SILK]  117.09,67.06 270 top
J88  External On/Off  [1X02_NO_SILK]  117.09,39.12 90 top
J89  [1X10_NO_SILK]  119.63,41.66 0 top
J90  [1X10_NO_SILK]  119.63,39.12 0 top
J91  [1X09_NO_SILK]  119.63,67.06 0 top
J92  JST  [JST-2-SMD]  108.2,49.28 90 top
J93  [1X04_1MM_RA]  143.89,52.96 90 top
J94  [1X09_NO_SILK]  119.63,64.52 0 top
J95  [1X01_NO_SILK]  142.49,64.52 0 top
J96  U.FL  [U.FL]  142.49,59.94 90 top
J97  [USB-MICROB-PTH-MILL]  155.83,58.17 270 top
J98  PTH  [1X02_NO_SILK]  163.32,48.01 90 top
J99  [1X02_NO_SILK]  164.59,67.06 270 top
J100  External On/Off  [1X02_NO_SILK]  164.59,39.12 90 top
J101  [1X10_NO_SILK]  167.13,41.66 0 top
J102  [1X10_NO_SILK]  167.13,39.12 0 top
J103  [1X09_NO_SILK]  167.13,67.06 0 top
J104  JST  [JST-2-SMD]  155.7,49.28 90 top
J105  [1X04_1MM_RA]  191.39,52.96 90 top
J106  [1X09_NO_SILK]  167.13,64.52 0 top
J107  [1X01_NO_SILK]  189.99,64.52 0 top
J108  U.FL  [U.FL]  189.99,59.94 90 top
J109  [USB-MICROB-PTH-MILL]  203.33,58.17 270 top
J110  PTH  [1X02_NO_SILK]  210.82,48.01 90 top
J111  [1X02_NO_SILK]  212.09,67.06 270 top
J112  External On/Off  [1X02_NO_SILK]  212.09,39.12 90 top
J113  [1X10_NO_SILK]  214.63,41.66 0 top
J114  [1X10_NO_SILK]  214.63,39.12 0 top
J115  [1X09_NO_SILK]  214.63,67.06 0 top
J116  JST  [JST-2-SMD]  203.2,49.28 90 top
J117  [1X04_1MM_RA]  238.89,52.96 90 top
J118  [1X09_NO_SILK]  214.63,64.52 0 top
J119  [1X01_NO_SILK]  237.49,64.52 0 top
J120  U.FL  [U.FL]  237.49,59.94 90 top
J121  [USB-MICROB-PTH-MILL]  13.33,89.15 270 top
J122  PTH  [1X02_NO_SILK]  20.83,78.99 90 top
J123  [1X02_NO_SILK]  22.1,98.04 270 top
J124  External On/Off  [1X02_NO_SILK]  22.1,70.1 90 top
J125  [1X10_NO_SILK]  24.64,72.64 0 top
J126  [1X10_NO_SILK]  24.64,70.1 0 top
J127  [1X09_NO_SILK]  24.64,98.04 0 top
J128  JST  [JST-2-SMD]  13.21,80.26 90 top
J129  [1X04_1MM_RA]  48.89,83.95 90 top
J130  [1X09_NO_SILK]  24.64,95.5 0 top
J131  [1X01_NO_SILK]  47.5,95.5 0 top
J132  U.FL  [U.FL]  47.5,90.93 90 top
J133  [USB-MICROB-PTH-MILL]  60.83,89.15 270 top
J134  PTH  [1X02_NO_SILK]  68.33,78.99 90 top
J135  [1X02_NO_SILK]  69.6,98.04 270 top
J136  External On/Off  [1X02_NO_SILK]  69.6,70.1 90 top
J137  [1X10_NO_SILK]  72.14,72.64 0 top
J138  [1X10_NO_SILK]  72.14,70.1 0 top
J139  [1X09_NO_SILK]  72.14,98.04 0 top
J140  JST  [JST-2-SMD]  60.71,80.26 90 top
J141  [1X04_1MM_RA]  96.39,83.95 90 top
J142  [1X09_NO_SILK]  72.14,95.5 0 top
J143  [1X01_NO_SILK]  95,95.5 0 top
J144  U.FL  [U.FL]  95,90.93 90 top
J145  [USB-MICROB-PTH-MILL]  108.33,89.15 270 top
J146  PTH  [1X02_NO_SILK]  115.82,78.99 90 top
J147  [1X02_NO_SILK]  117.09,98.04 270 top
J148  External On/Off  [1X02_NO_SILK]  117.09,70.1 90 top
J149  [1X10_NO_SILK]  119.63,72.64 0 top
J150  [1X10_NO_SILK]  119.63,70.1 0 top
J151  [1X09_NO_SILK]  119.63,98.04 0 top
J152  JST  [JST-2-SMD]  108.2,80.26 90 top
J153  [1X04_1MM_RA]  143.89,83.95 90 top
J154  [1X09_NO_SILK]  119.63,95.5 0 top
J155  [1X01_NO_SILK]  142.49,95.5 0 top
J156  U.FL  [U.FL]  142.49,90.93 90 top
J157  [USB-MICROB-PTH-MILL]  155.83,89.15 270 top
J158  PTH  [1X02_NO_SILK]  163.32,78.99 90 top
J159  [1X02_NO_SILK]  164.59,98.04 270 top
J160  External On/Off  [1X02_NO_SILK]  164.59,70.1 90 top
J161  [1X10_NO_SILK]  167.13,72.64 0 top
J162  [1X10_NO_SILK]  167.13,70.1 0 top
J163  [1X09_NO_SILK]  167.13,98.04 0 top
J164  JST  [JST-2-SMD]  155.7,80.26 90 top
J165  [1X04_1MM_RA]  191.39,83.95 90 top
J166  [1X09_NO_SILK]  167.13,95.5 0 top
J167  [1X01_NO_SILK]  189.99,95.5 0 top
J168  U.FL  [U.FL]  189.99,90.93 90 top
J169  [USB-MICROB-PTH-MILL]  203.33,89.15 270 top
J170  PTH  [1X02_NO_SILK]  210.82,78.99 90 top
J171  [1X02_NO_SILK]  212.09,98.04 270 top
J172  External On/Off  [1X02_NO_SILK]  212.09,70.1 90 top
J173  [1X10_NO_SILK]  214.63,72.64 0 top
J174  [1X10_NO_SILK]  214.63,70.1 0 top
J175  [1X09_NO_SILK]  214.63,98.04 0 top
J176  JST  [JST-2-SMD]  203.2,80.26 90 top
J177  [1X04_1MM_RA]  238.89,83.95 90 top
J178  [1X09_NO_SILK]  214.63,95.5 0 top
J179  [1X01_NO_SILK]  237.49,95.5 0 top
J180  U.FL  [U.FL]  237.49,90.93 90 top
JP1  [SMT-JUMPER_2_NO_SILK]  76.45,15.24 0 bottom
JP2  [SMT-JUMPER_2_NO_SILK]  73.03,15.24 180 bottom
JP3  [SMT-JUMPER_2_NO_SILK]  28.96,15.24 0 bottom
JP4  [SMT-JUMPER_2_NO_SILK]  25.53,15.24 180 bottom
JP5  [SMT-JUMPER_2_NO_SILK]  123.95,15.24 0 bottom
JP6  [SMT-JUMPER_2_NO_SILK]  120.52,15.24 180 bottom
JP7  [SMT-JUMPER_2_NO_SILK]  171.45,15.24 0 bottom
JP8  [SMT-JUMPER_2_NO_SILK]  168.02,15.24 180 bottom
JP9  [SMT-JUMPER_2_NO_SILK]  218.95,15.24 0 bottom
JP10  [SMT-JUMPER_2_NO_SILK]  215.52,15.24 180 bottom
JP11  [SMT-JUMPER_2_NO_SILK]  28.96,46.23 0 bottom
JP12  [SMT-JUMPER_2_NO_SILK]  25.53,46.23 180 bottom
JP13  [SMT-JUMPER_2_NO_SILK]  76.45,46.23 0 bottom
JP14  [SMT-JUMPER_2_NO_SILK]  73.03,46.23 180 bottom
JP15  [SMT-JUMPER_2_NO_SILK]  123.95,46.23 0 bottom
JP16  [SMT-JUMPER_2_NO_SILK]  120.52,46.23 180 bottom
JP17  [SMT-JUMPER_2_NO_SILK]  171.45,46.23 0 bottom
JP18  [SMT-JUMPER_2_NO_SILK]  168.02,46.23 180 bottom
JP19  [SMT-JUMPER_2_NO_SILK]  218.95,46.23 0 bottom
JP20  [SMT-JUMPER_2_NO_SILK]  215.52,46.23 180 bottom
JP21  [SMT-JUMPER_2_NO_SILK]  28.96,77.22 0 bottom
JP22  [SMT-JUMPER_2_NO_SILK]  25.53,77.22 180 bottom
JP23  [SMT-JUMPER_2_NO_SILK]  76.45,77.22 0 bottom
JP24  [SMT-JUMPER_2_NO_SILK]  73.03,77.22 180 bottom
JP25  [SMT-JUMPER_2_NO_SILK]  123.95,77.22 0 bottom
JP26  [SMT-JUMPER_2_NO_SILK]  120.52,77.22 180 bottom
JP27  [SMT-JUMPER_2_NO_SILK]  171.45,77.22 0 bottom
JP28  [SMT-JUMPER_2_NO_SILK]  168.02,77.22 180 bottom
JP29  [SMT-JUMPER_2_NO_SILK]  218.95,77.22 0 bottom
JP30  [SMT-JUMPER_2_NO_SILK]  215.52,77.22 180 bottom
L1  [0603]  34.16,28.45 270 top
L2  [0603]  81.66,28.45 270 top
L3  [0603]  129.16,28.45 270 top
L4  [0603]  176.66,28.45 270 top
L5  [0603]  224.16,28.45 270 top
L6  [0603]  34.16,59.44 270 top
L7  [0603]  81.66,59.44 270 top
L8  [0603]  129.16,59.44 270 top
L9  [0603]  176.66,59.44 270 top
L10  [0603]  224.16,59.44 270 top
L11  [0603]  34.16,90.42 270 top
L12  [0603]  81.66,90.42 270 top
L13  [0603]  129.16,90.42 270 top
L14  [0603]  176.66,90.42 270 top
L15  [0603]  224.16,90.42 270 top
LED1  RED  [LED-0603]  28.83,17.65 0 top
LED2  RED  [LED-0603]  76.33,17.65 0 top
LED3  RED  [LED-0603]  123.83,17.65 0 top
LED4  RED  [LED-0603]  171.32,17.65 0 top
LED5  RED  [LED-0603]  218.82,17.65 0 top
LED6  RED  [LED-0603]  28.83,48.64 0 top
LED7  RED  [LED-0603]  76.33,48.64 0 top
LED8  RED  [LED-0603]  123.83,48.64 0 top
LED9  RED  [LED-0603]  171.32,48.64 0 top
LED10  RED  [LED-0603]  218.82,48.64 0 top
LED11  RED  [LED-0603]  28.83,79.63 0 top
LED12  RED  [LED-0603]  76.33,79.63 0 top
LED13  RED  [LED-0603]  123.83,79.63 0 top
LED14  RED  [LED-0603]  171.32,79.63 0 top
LED15  RED  [LED-0603]  218.82,79.63 0 top
LOGO1  OSHW-LOGOMINI  [OSHW-LOGO-MINI]  11.68,32.77 0 bottom
LOGO2  SFE_LOGO_NAME.1_INCH  [SFE_LOGO_NAME_.1]  29.59,20.19 0 bottom
LOGO3  OSHW-LOGOMINI  [OSHW-LOGO-MINI]  59.18,32.77 0 bottom
LOGO4  SFE_LOGO_NAME.1_INCH  [SFE_LOGO_NAME_.1]  77.09,20.19 0 bottom
LOGO5  OSHW-LOGOMINI  [OSHW-LOGO-MINI]  106.68,32.77 0 bottom
LOGO6  SFE_LOGO_NAME.1_INCH  [SFE_LOGO_NAME_.1]  124.59,20.19 0 bottom
LOGO7  OSHW-LOGOMINI  [OSHW-LOGO-MINI]  154.18,32.77 0 bottom
LOGO8  SFE_LOGO_NAME.1_INCH  [SFE_LOGO_NAME_.1]  172.09,20.19 0 bottom
LOGO9  OSHW-LOGOMINI  [OSHW-LOGO-MINI]  201.68,32.77 0 bottom
LOGO10  SFE_LOGO_NAME.1_INCH  [SFE_LOGO_NAME_.1]  219.58,20.19 0 bottom
LOGO11  OSHW-LOGOMINI  [OSHW-LOGO-MINI]  11.68,63.75 0 bottom
LOGO12  SFE_LOGO_NAME.1_INCH  [SFE_LOGO_NAME_.1]  29.59,51.18 0 bottom
LOGO13  OSHW-LOGOMINI  [OSHW-LOGO-MINI]  59.18,63.75 0 bottom
LOGO14  SFE_LOGO_NAME.1_INCH  [SFE_LOGO_NAME_.1]  77.09,51.18 0 bottom
LOGO15  OSHW-LOGOMINI  [OSHW-LOGO-MINI]  106.68,63.75 0 bottom
LOGO16  SFE_LOGO_NAME.1_INCH  [SFE_LOGO_NAME_.1]  124.59,51.18 0 bottom
LOGO17  OSHW-LOGOMINI  [OSHW-LOGO-MINI]  154.18,63.75 0 bottom
LOGO18  SFE_LOGO_NAME.1_INCH  [SFE_LOGO_NAME_.1]  172.09,51.18 0 bottom
LOGO19  OSHW-LOGOMINI  [OSHW-LOGO-MINI]  201.68,63.75 0 bottom
LOGO20  SFE_LOGO_NAME.1_INCH  [SFE_LOGO_NAME_.1]  219.58,51.18 0 bottom
LOGO21  OSHW-LOGOMINI  [OSHW-LOGO-MINI]  11.68,94.74 0 bottom
LOGO22  SFE_LOGO_NAME.1_INCH  [SFE_LOGO_NAME_.1]  29.59,82.17 0 bottom
LOGO23  OSHW-LOGOMINI  [OSHW-LOGO-MINI]  59.18,94.74 0 bottom
LOGO24  SFE_LOGO_NAME.1_INCH  [SFE_LOGO_NAME_.1]  77.09,82.17 0 bottom
LOGO25  OSHW-LOGOMINI  [OSHW-LOGO-MINI]  106.68,94.74 0 bottom
LOGO26  SFE_LOGO_NAME.1_INCH  [SFE_LOGO_NAME_.1]  124.59,82.17 0 bottom
LOGO27  OSHW-LOGOMINI  [OSHW-LOGO-MINI]  154.18,94.74 0 bottom
LOGO28  SFE_LOGO_NAME.1_INCH  [SFE_LOGO_NAME_.1]  172.09,82.17 0 bottom
LOGO29  OSHW-LOGOMINI  [OSHW-LOGO-MINI]  201.68,94.74 0 bottom
LOGO30  SFE_LOGO_NAME.1_INCH  [SFE_LOGO_NAME_.1]  219.58,82.17 0 bottom
Q1  2.5A/30V  [SOT23-3]  14.61,18.41 270 bottom
Q2  2.5A/30V  [SOT23-3]  62.1,18.41 270 bottom
Q3  2.5A/30V  [SOT23-3]  109.6,18.41 270 bottom
Q4  2.5A/30V  [SOT23-3]  157.1,18.41 270 bottom
Q5  2.5A/30V  [SOT23-3]  204.6,18.41 270 bottom
Q6  2.5A/30V  [SOT23-3]  14.61,49.4 270 bottom
Q7  2.5A/30V  [SOT23-3]  62.1,49.4 270 bottom
Q8  2.5A/30V  [SOT23-3]  109.6,49.4 270 bottom
Q9  2.5A/30V  [SOT23-3]  157.1,49.4 270 bottom
Q10  2.5A/30V  [SOT23-3]  204.6,49.4 270 bottom
Q11  2.5A/30V  [SOT23-3]  14.61,80.39 270 bottom
Q12  2.5A/30V  [SOT23-3]  62.1,80.39 270 bottom
Q13  2.5A/30V  [SOT23-3]  109.6,80.39 270 bottom
Q14  2.5A/30V  [SOT23-3]  157.1,80.39 270 bottom
Q15  2.5A/30V  [SOT23-3]  204.6,80.39 270 bottom
R1  1M  [0603]  31.11,26.8 180 top
R2  1M  [0603]  31.11,28.32 0 top
R3  1k  [0603]  27.43,20.07 180 bottom
R4  10k  [0603]  31.11,22.86 0 top
R5  2.0k  [0603]  24.13,23.88 270 top
R6  10k  [0603]  17.65,29.84 0 top
R7  1k  [0603]  25.53,14.48 0 top
R8  10k  [0603]  16.76,23.62 270 bottom
R9  1k  [0603]  25.53,19.3 0 top
R10  1k  [0603]  25.53,16.13 0 top
R11  1k  [0603]  73.03,16.13 0 top
R12  1k  [0603]  73.03,17.65 180 top
R13  1k  [0603]  25.53,17.65 180 top
R14  2.0k  [0603]  71.63,23.88 270 top
R15  10k  [0603]  65.15,29.84 0 top
R16  1k  [0603]  73.03,14.48 0 top
R17  1k  [0603]  73.03,19.3 0 top
R18  1M  [0603]  78.61,26.8 180 top
R19  1M  [0603]  78.61,28.32 0 top
R20  10k  [0603]  78.61,22.86 0 top
R21  1k  [0603]  74.93,20.07 180 bottom
R22  10k  [0603]  64.26,23.62 270 bottom
R23  1k  [0603]  120.52,16.13 0 top
R24  1k  [0603]  120.52,17.65 180 top
R25  2.0k  [0603]  119.13,23.88 270 top
R26  10k  [0603]  112.65,29.84 0 top
R27  1k  [0603]  120.52,14.48 0 top
R28  1k  [0603]  120.52,19.3 0 top
R29  1M  [0603]  126.11,26.8 180 top
R30  1M  [0603]  126.11,28.32 0 top
R31  10k  [0603]  126.11,22.86 0 top
R32  1k  [0603]  122.43,20.07 180 bottom
R33  10k  [0603]  111.76,23.62 270 bottom
R34  1k  [0603]  168.02,16.13 0 top
R35  1k  [0603]  168.02,17.65 180 top
R36  2.0k  [0603]  166.62,23.88 270 top
R37  10k  [0603]  160.15,29.84 0 top
R38  1k  [0603]  168.02,14.48 0 top
R39  1k  [0603]  168.02,19.3 0 top
R40  1M  [0603]  173.61,26.8 180 top
R41  1M  [0603]  173.61,28.32 0 top
R42  10k  [0603]  173.61,22.86 0 top
R43  1k  [0603]  169.93,20.07 180 bottom
R44  10k  [0603]  159.26,23.62 270 bottom
R45  1k  [0603]  215.52,16.13 0 top
R46  1k  [0603]  215.52,17.65 180 top
R47  2.0k  [0603]  214.12,23.88 270 top
R48  10k  [0603]  207.65,29.84 0 top
R49  1k  [0603]  215.52,14.48 0 top
R50  1k  [0603]  215.52,19.3 0 top
R51  1M  [0603]  221.11,26.8 180 top
R52  1M  [0603]  221.11,28.32 0 top
R53  10k  [0603]  221.11,22.86 0 top
R54  1k  [0603]  217.42,20.07 180 bottom
R55  10k  [0603]  206.76,23.62 270 bottom
R56  1k  [0603]  25.53,47.12 0 top
R57  1k  [0603]  25.53,48.64 180 top
R58  2.0k  [0603]  24.13,54.86 270 top
R59  10k  [0603]  17.65,60.83 0 top
R60  1k  [0603]  25.53,45.47 0 top
R61  1k  [0603]  25.53,50.29 0 top
R62  1M  [0603]  31.11,57.78 180 top
R63  1M  [0603]  31.11,59.31 0 top
R64  10k  [0603]  31.11,53.85 0 top
R65  1k  [0603]  27.43,51.05 180 bottom
R66  10k  [0603]  16.76,54.61 270 bottom
R67  1k  [0603]  73.03,47.12 0 top
R68  1k  [0603]  73.03,48.64 180 top
R69  2.0k  [0603]  71.63,54.86 270 top
R70  10k  [0603]  65.15,60.83 0 top
R71  1k  [0603]  73.03,45.47 0 top
R72  1k  [0603]  73.03,50.29 0 top
R73  1M  [0603]  78.61,57.78 180 top
R74  1M  [0603]  78.61,59.31 0 top
R75  10k  [0603]  78.61,53.85 0 top
R76  1k  [0603]  74.93,51.05 180 bottom
R77  10k  [0603]  64.26,54.61 270 bottom
R78  1k  [0603]  120.52,47.12 0 top
R79  1k  [0603]  120.52,48.64 180 top
R80  2.0k  [0603]  119.13,54.86 270 top
R81  10k  [0603]  112.65,60.83 0 top
R82  1k  [0603]  120.52,45.47 0 top
R83  1k  [0603]  120.52,50.29 0 top
R84  1M  [0603]  126.11,57.78 180 top
R85  1M  [0603]  126.11,59.31 0 top
R86  10k  [0603]  126.11,53.85 0 top
R87  1k  [0603]  122.43,51.05 180 bottom
R88  10k  [0603]  111.76,54.61 270 bottom
R89  1k  [0603]  168.02,47.12 0 top
R90  1k  [0603]  168.02,48.64 180 top
R91  2.0k  [0603]  166.62,54.86 270 top
R92  10k  [0603]  160.15,60.83 0 top
R93  1k  [0603]  168.02,45.47 0 top
R94  1k  [0603]  168.02,50.29 0 top
R95  1M  [0603]  173.61,57.78 180 top
R96  1M  [0603]  173.61,59.31 0 top
R97  10k  [0603]  173.61,53.85 0 top
R98  1k  [0603]  169.93,51.05 180 bottom
R99  10k  [0603]  159.26,54.61 270 bottom
R100  1k  [0603]  215.52,47.12 0 top
R101  1k  [0603]  215.52,48.64 180 top
R102  2.0k  [0603]  214.12,54.86 270 top
R103  10k  [0603]  207.65,60.83 0 top
R104  1k  [0603]  215.52,45.47 0 top
R105  1k  [0603]  215.52,50.29 0 top
R106  1M  [0603]  221.11,57.78 180 top
R107  1M  [0603]  221.11,59.31 0 top
R108  10k  [0603]  221.11,53.85 0 top
R109  1k  [0603]  217.42,51.05 180 bottom
R110  10k  [0603]  206.76,54.61 270 bottom
R111  1k  [0603]  25.53,78.11 0 top
R112  1k  [0603]  25.53,79.63 180 top
R113  2.0k  [0603]  24.13,85.85 270 top
R114  10k  [0603]  17.65,91.82 0 top
R115  1k  [0603]  25.53,76.45 0 top
R116  1k  [0603]  25.53,81.28 0 top
R117  1M  [0603]  31.11,88.77 180 top
R118  1M  [0603]  31.11,90.3 0 top
R119  10k  [0603]  31.11,84.84 0 top
R120  1k  [0603]  27.43,82.04 180 bottom
R121  10k  [0603]  16.76,85.6 270 bottom
R122  1k  [0603]  73.03,78.11 0 top
R123  1k  [0603]  73.03,79.63 180 top
R124  2.0k  [0603]  71.63,85.85 270 top
R125  10k  [0603]  65.15,91.82 0 top
R126  1k  [0603]  73.03,76.45 0 top
R127  1k  [0603]  73.03,81.28 0 top
R128  1M  [0603]  78.61,88.77 180 top
R129  1M  [0603]  78.61,90.3 0 top
R130  10k  [0603]  78.61,84.84 0 top
R131  1k  [0603]  74.93,82.04 180 bottom
R132  10k  [0603]  64.26,85.6 270 bottom
R133  1k  [0603]  120.52,78.11 0 top
R134  1k  [0603]  120.52,79.63 180 top
R135  2.0k  [0603]  119.13,85.85 270 top
R136  10k  [0603]  112.65,91.82 0 top
R137  1k  [0603]  120.52,76.45 0 top
R138  1k  [0603]  120.52,81.28 0 top
R139  1M  [0603]  126.11,88.77 180 top
R140  1M  [0603]  126.11,90.3 0 top
R141  10k  [0603]  126.11,84.84 0 top
R142  1k  [0603]  122.43,82.04 180 bottom
R143  10k  [0603]  111.76,85.6 270 bottom
R144  1k  [0603]  168.02,78.11 0 top
R145  1k  [0603]  168.02,79.63 180 top
R146  2.0k  [0603]  166.62,85.85 270 top
R147  10k  [0603]  160.15,91.82 0 top
R148  1k  [0603]  168.02,76.45 0 top
R149  1k  [0603]  168.02,81.28 0 top
R150  1M  [0603]  173.61,88.77 180 top
R151  1M  [0603]  173.61,90.3 0 top
R152  10k  [0603]  173.61,84.84 0 top
R153  1k  [0603]  169.93,82.04 180 bottom
R154  10k  [0603]  159.26,85.6 270 bottom
R155  1k  [0603]  215.52,78.11 0 top
R156  1k  [0603]  215.52,79.63 180 top
R157  2.0k  [0603]  214.12,85.85 270 top
R158  10k  [0603]  207.65,91.82 0 top
R159  1k  [0603]  215.52,76.45 0 top
R160  1k  [0603]  215.52,81.28 0 top
R161  1M  [0603]  221.11,88.77 180 top
R162  1M  [0603]  221.11,90.3 0 top
R163  10k  [0603]  221.11,84.84 0 top
R164  1k  [0603]  217.42,82.04 180 bottom
R165  10k  [0603]  206.76,85.6 270 bottom
S1  Power  [SWITCH_SPST_SMD_A]  15.75,10.92 180 top
S2  Power  [SWITCH_SPST_SMD_A]  63.25,10.92 180 top
S3  [TACTILE_SWITCH_SMD_RIGHT_ANGLE]  15.75,33.27 180 top
S4  [TACTILE_SWITCH_SMD_RIGHT_ANGLE]  63.25,33.27 180 top
S5  Power  [SWITCH_SPST_SMD_A]  110.74,10.92 180 top
S6  [TACTILE_SWITCH_SMD_RIGHT_ANGLE]  110.74,33.27 180 top
S7  Power  [SWITCH_SPST_SMD_A]  158.24,10.92 180 top
S8  [TACTILE_SWITCH_SMD_RIGHT_ANGLE]  158.24,33.27 180 top
S9  Power  [SWITCH_SPST_SMD_A]  205.74,10.92 180 top
S10  [TACTILE_SWITCH_SMD_RIGHT_ANGLE]  205.74,33.27 180 top
S11  Power  [SWITCH_SPST_SMD_A]  15.75,41.91 180 top
S12  [TACTILE_SWITCH_SMD_RIGHT_ANGLE]  15.75,64.26 180 top
S13  Power  [SWITCH_SPST_SMD_A]  63.25,41.91 180 top
S14  [TACTILE_SWITCH_SMD_RIGHT_ANGLE]  63.25,64.26 180 top
S15  Power  [SWITCH_SPST_SMD_A]  110.74,41.91 180 top
S16  [TACTILE_SWITCH_SMD_RIGHT_ANGLE]  110.74,64.26 180 top
S17  Power  [SWITCH_SPST_SMD_A]  158.24,41.91 180 top
S18  [TACTILE_SWITCH_SMD_RIGHT_ANGLE]  158.24,64.26 180 top
S19  Power  [SWITCH_SPST_SMD_A]  205.74,41.91 180 top
S20  [TACTILE_SWITCH_SMD_RIGHT_ANGLE]  205.74,64.26 180 top
S21  Power  [SWITCH_SPST_SMD_A]  15.75,72.9 180 top
S22  [TACTILE_SWITCH_SMD_RIGHT_ANGLE]  15.75,95.25 180 top
S23  Power  [SWITCH_SPST_SMD_A]  63.25,72.9 180 top
S24  [TACTILE_SWITCH_SMD_RIGHT_ANGLE]  63.25,95.25 180 top
S25  Power  [SWITCH_SPST_SMD_A]  110.74,72.9 180 top
S26  [TACTILE_SWITCH_SMD_RIGHT_ANGLE]  110.74,95.25 180 top
S27  Power  [SWITCH_SPST_SMD_A]  158.24,72.9 180 top
S28  [TACTILE_SWITCH_SMD_RIGHT_ANGLE]  158.24,95.25 180 top
S29  Power  [SWITCH_SPST_SMD_A]  205.74,72.9 180 top
S30  [TACTILE_SWITCH_SMD_RIGHT_ANGLE]  205.74,95.25 180 top
TP1  TEST-POINT3  [PAD.03X.03]  43.69,13.21 90 bottom
TP2  TEST-POINT3  [PAD.03X.03]  41.15,13.21 90 bottom
TP3  TEST-POINT3  [PAD.03X.03]  91.19,13.21 90 bottom
TP4  TEST-POINT3  [PAD.03X.03]  88.65,13.21 90 bottom
TP5  TEST-POINT3  [PAD.03X.03]  138.68,13.21 90 bottom
TP6  TEST-POINT3  [PAD.03X.03]  136.14,13.21 90 bottom
TP7  TEST-POINT3  [PAD.03X.03]  186.18,13.21 90 bottom
TP8  TEST-POINT3  [PAD.03X.03]  183.64,13.21 90 bottom
TP9  TEST-POINT3  [PAD.03X.03]  233.68,13.21 90 bottom
TP10  TEST-POINT3  [PAD.03X.03]  231.14,13.21 90 bottom
TP11  TEST-POINT3  [PAD.03X.03]  43.69,44.2 90 bottom
TP12  TEST-POINT3  [PAD.03X.03]  41.15,44.2 90 bottom
TP13  TEST-POINT3  [PAD.03X.03]  91.19,44.2 90 bottom
TP14  TEST-POINT3  [PAD.03X.03]  88.65,44.2 90 bottom
TP15  TEST-POINT3  [PAD.03X.03]  138.68,44.2 90 bottom
TP16  TEST-POINT3  [PAD.03X.03]  136.14,44.2 90 bottom
TP17  TEST-POINT3  [PAD.03X.03]  186.18,44.2 90 bottom
TP18  TEST-POINT3  [PAD.03X.03]  183.64,44.2 90 bottom
TP19  TEST-POINT3  [PAD.03X.03]  233.68,44.2 90 bottom
TP20  TEST-POINT3  [PAD.03X.03]  231.14,44.2 90 bottom
TP21  TEST-POINT3  [PAD.03X.03]  43.69,75.18 90 bottom
TP22  TEST-POINT3  [PAD.03X.03]  41.15,75.18 90 bottom
TP23  TEST-POINT3  [PAD.03X.03]  91.19,75.18 90 bottom
TP24  TEST-POINT3  [PAD.03X.03]  88.65,75.18 90 bottom
TP25  TEST-POINT3  [PAD.03X.03]  138.68,75.18 90 bottom
TP26  TEST-POINT3  [PAD.03X.03]  136.14,75.18 90 bottom
TP27  TEST-POINT3  [PAD.03X.03]  186.18,75.18 90 bottom
TP28  TEST-POINT3  [PAD.03X.03]  183.64,75.18 90 bottom
TP29  TEST-POINT3  [PAD.03X.03]  233.68,75.18 90 bottom
TP30  TEST-POINT3  [PAD.03X.03]  231.14,75.18 90 bottom
U1  MCP73831  [SOT23-5]  26.8,24 90 top
U2  MCP73831  [SOT23-5]  74.3,24 90 top
U3  RFM95W  [RFM95/96/97/98W]  40.64,22.23 180 bottom
U4  ATSAMD21G  [QFN-48_NO_EXPOSED_PAD]  38.86,22.23 270 top
U5  3.3V  [SOT23-5]  68.83,23.88 270 top
U6  3.3V  [SOT23-5]  21.34,23.88 270 top
U7  ATSAMD21G  [QFN-48_NO_EXPOSED_PAD]  86.36,22.23 270 top
U8  RFM95W  [RFM95/96/97/98W]  88.14,22.23 180 bottom
U9  MCP73831  [SOT23-5]  121.79,24 90 top
U10  3.3V  [SOT23-5]  116.33,23.88 270 top
U11  ATSAMD21G  [QFN-48_NO_EXPOSED_PAD]  133.86,22.23 270 top
U12  RFM95W  [RFM95/96/97/98W]  135.64,22.23 180 bottom
U13  MCP73831  [SOT23-5]  169.29,24 90 top
U14  3.3V  [SOT23-5]  163.83,23.88 270 top
U15  ATSAMD21G  [QFN-48_NO_EXPOSED_PAD]  181.36,22.23 270 top
U16  RFM95W  [RFM95/96/97/98W]  183.13,22.23 180 bottom
U17  MCP73831  [SOT23-5]  216.79,24 90 top
U18  3.3V  [SOT23-5]  211.33,23.88 270 top
U19  ATSAMD21G  [QFN-48_NO_EXPOSED_PAD]  228.85,22.23 270 top
U20  RFM95W  [RFM95/96/97/98W]  230.63,22.23 180 bottom
U21  MCP73831  [SOT23-5]  26.8,54.99 90 top
U22  3.3V  [SOT23-5]  21.34,54.86 270 top
U23  ATSAMD21G  [QFN-48_NO_EXPOSED_PAD]  38.86,53.21 270 top
U24  RFM95W  [RFM95/96/97/98W]  40.64,53.21 180 bottom
U25  MCP73831  [SOT23-5]  74.3,54.99 90 top
U26  3.3V  [SOT23-5]  68.83,54.86 270 top
U27  ATSAMD21G  [QFN-48_NO_EXPOSED_PAD]  86.36,53.21 270 top
U28  RFM95W  [RFM95/96/97/98W]  88.14,53.21 180 bottom
U29  MCP73831  [SOT23-5]  121.79,54.99 90 top
U30  3.3V  [SOT23-5]  116.33,54.86 270 top
U31  ATSAMD21G  [QFN-48_NO_EXPOSED_PAD]  133.86,53.21 270 top
U32  RFM95W  [RFM95/96/97/98W]  135.64,53.21 180 bottom
U33  MCP73831  [SOT23-5]  169.29,54.99 90 top
U34  3.3V  [SOT23-5]  163.83,54.86 270 top
U35  ATSAMD21G  [QFN-48_NO_EXPOSED_PAD]  181.36,53.21 270 top
U36  RFM95W  [RFM95/96/97/98W]  183.13,53.21 180 bottom
U37  MCP73831  [SOT23-5]  216.79,54.99 90 top
U38  3.3V  [SOT23-5]  211.33,54.86 270 top
U39  ATSAMD21G  [QFN-48_NO_EXPOSED_PAD]  228.85,53.21 270 top
U40  RFM95W  [RFM95/96/97/98W]  230.63,53.21 180 bottom
U41  MCP73831  [SOT23-5]  26.8,85.98 90 top
U42  3.3V  [SOT23-5]  21.34,85.85 270 top
U43  ATSAMD21G  [QFN-48_NO_EXPOSED_PAD]  38.86,84.2 270 top
U44  RFM95W  [RFM95/96/97/98W]  40.64,84.2 180 bottom
U45  MCP73831  [SOT23-5]  74.3,85.98 90 top
U46  3.3V  [SOT23-5]  68.83,85.85 270 top
U47  ATSAMD21G  [QFN-48_NO_EXPOSED_PAD]  86.36,84.2 270 top
U48  RFM95W  [RFM95/96/97/98W]  88.14,84.2 180 bottom
U49  MCP73831  [SOT23-5]  121.79,85.98 90 top
U50  3.3V  [SOT23-5]  116.33,85.85 270 top
U51  ATSAMD21G  [QFN-48_NO_EXPOSED_PAD]  133.86,84.2 270 top
U52  RFM95W  [RFM95/96/97/98W]  135.64,84.2 180 bottom
U53  MCP73831  [SOT23-5]  169.29,85.98 90 top
U54  3.3V  [SOT23-5]  163.83,85.85 270 top
U55  ATSAMD21G  [QFN-48_NO_EXPOSED_PAD]  181.36,84.2 270 top
U56  RFM95W  [RFM95/96/97/98W]  183.13,84.2 180 bottom
U57  MCP73831  [SOT23-5]  216.79,85.98 90 top
U58  3.3V  [SOT23-5]  211.33,85.85 270 top
U59  ATSAMD21G  [QFN-48_NO_EXPOSED_PAD]  228.85,84.2 270 top
U60  RFM95W  [RFM95/96/97/98W]  230.63,84.2 180 bottom
U$1  [SAMD21_PRO_RF0]  34.67,15.49 0 top
U$2  [D20]  38.73,12.45 0 bottom
U$3  [A43]  33.4,31.75 0 top
U$4  [A34]  35.94,31.75 0 top
U$5  [A25]  38.48,31.75 0 top
U$6  [A16]  41.02,31.75 0 top
U$7  [A07]  43.43,31.75 0 top
U$8  [MISO8]  25.15,31.75 0 top
U$9  [MOSI9]  27.81,31.75 0 top
U$10  [SCK10]  30.73,31.75 0 top
U$11  [ANT11]  45.59,31.75 0 top
U$12  [GND0]  20.57,33.91 90 top
U$13  [RST2]  40.77,12.45 0 top
U$14  [CHG1]  20.32,31.75 0 top
U$15  [D90]  28.32,12.45 0 top
U$16  [D90]  30.99,12.45 0 bottom
U$17  [GND0]  49.28,10.16 270 bottom
U$18  [D20]  35.94,12.45 0 top
U$19  [RX2]  48.77,12.45 0 bottom
U$20  [D30]  33.4,12.45 0 top
U$21  [D30]  36.2,12.45 0 bottom
U$22  [D40]  30.86,12.45 0 top
U$23  [3V320]  25.53,12.45 0 top
U$24  [RAW21]  22.86,12.45 0 top
U$25  [LORA0]  31.75,17.14 0 bottom
U$26  [A43]  80.9,31.75 0 top
U$27  [SWITCH23]  20.45,6.73 90 top
U$28  [RST2]  14.1,31.12 0 top
U$29  [BATT25]  22.48,16.13 90 top
U$30  [QWIIC-LOGO-MEDIUM]  23.62,27.56 0 bottom
U$31  [D40]  33.66,12.45 0 bottom
U$32  [BATT25]  22.48,20.45 270 bottom
U$33  [D50]  41.15,12.45 0 bottom
U$34  [A34]  83.44,31.75 0 top
U$35  [WAN1]  28.32,17.14 0 bottom
U$36  [RST2]  17.4,33.27 0 bottom
U$37  [SWITCH23]  20.45,12.19 270 bottom
U$38  [GND0]  20.57,37.46 270 bottom
U$39  [ON#OFF0]  18.54,10.03 0 bottom
U$40  [CHG1]  24,31.75 0 bottom
U$41  [RST2]  43.94,12.45 0 bottom
U$42  [A43]  36.2,31.75 0 bottom
U$43  [A34]  38.86,31.75 0 bottom
U$44  [A25]  41.4,31.75 0 bottom
U$45  [A16]  43.81,31.75 0 bottom
U$46  [A07]  46.36,31.75 0 bottom
U$47  [MISO8]  29.08,31.75 0 bottom
U$48  [MOSI9]  31.88,31.75 0 bottom
U$49  [SCK10]  34.04,31.75 0 bottom
U$50  [ANT11]  49.4,31.75 0 bottom
U$51  [SFE_LOGO_FLAME_.2]  49.53,12.7 0 top
U$52  [RAW21]  26.42,12.45 0 bottom
U$53  [3V320]  28.83,12.45 0 bottom
U$54  [STAT0]  30.61,20.95 0 top
U$55  [D514]  38.48,12.45 0 top
U$56  [A25]  85.98,31.75 0 top
U$57  [TX3]  46.36,12.45 0 bottom
U$58  [A16]  88.52,31.75 0 top
U$59  [A07]  90.93,31.75 0 top
U$60  [QWIIC-TEXT-04]  48.77,26.29 0 top
U$61  [OSHW-LOGO-MINI]  11.68,32.77 0 top
U$62  [GND0]  49.28,6.48 90 top
U$63  [PWR-()-03]  30.61,17.65 0 top
U$64  [MISO8]  72.64,31.75 0 top
U$65  [CHG1]  30.61,19.3 0 top
U$66  [MOSI9]  75.31,31.75 0 top
U$67  [SCK10]  78.23,31.75 0 top
U$68  [ANT11]  93.09,31.75 0 top
U$69  [TX3]  43.56,12.45 0 top
U$70  [TX6]  30.61,14.61 0 top
U$71  [GND0]  68.07,33.91 90 top
U$72  [RX7]  30.61,16.13 0 top
U$73  [RX2]  46.1,12.45 0 top
U$74  [RST2]  88.27,12.45 0 top
U$75  [CHG1]  67.82,31.75 0 top
U$76  [3V320]  73.03,12.45 0 top
U$77  [RAW21]  70.36,12.45 0 top
U$78  [SWITCH23]  67.94,6.73 90 top
U$79  [RST2]  61.59,31.12 0 top
U$80  [BATT25]  69.98,16.13 90 top
U$81  [BATT25]  69.98,20.45 270 bottom
U$82  [RST2]  64.9,33.27 0 bottom
U$83  [SWITCH23]  67.94,12.19 270 bottom
U$84  [GND0]  68.07,37.46 270 bottom
U$85  [ON#OFF0]  66.04,10.03 0 bottom
U$86  [CHG1]  71.5,31.75 0 bottom